# EAGLE board detector-opamp (EAGLE 6.3)
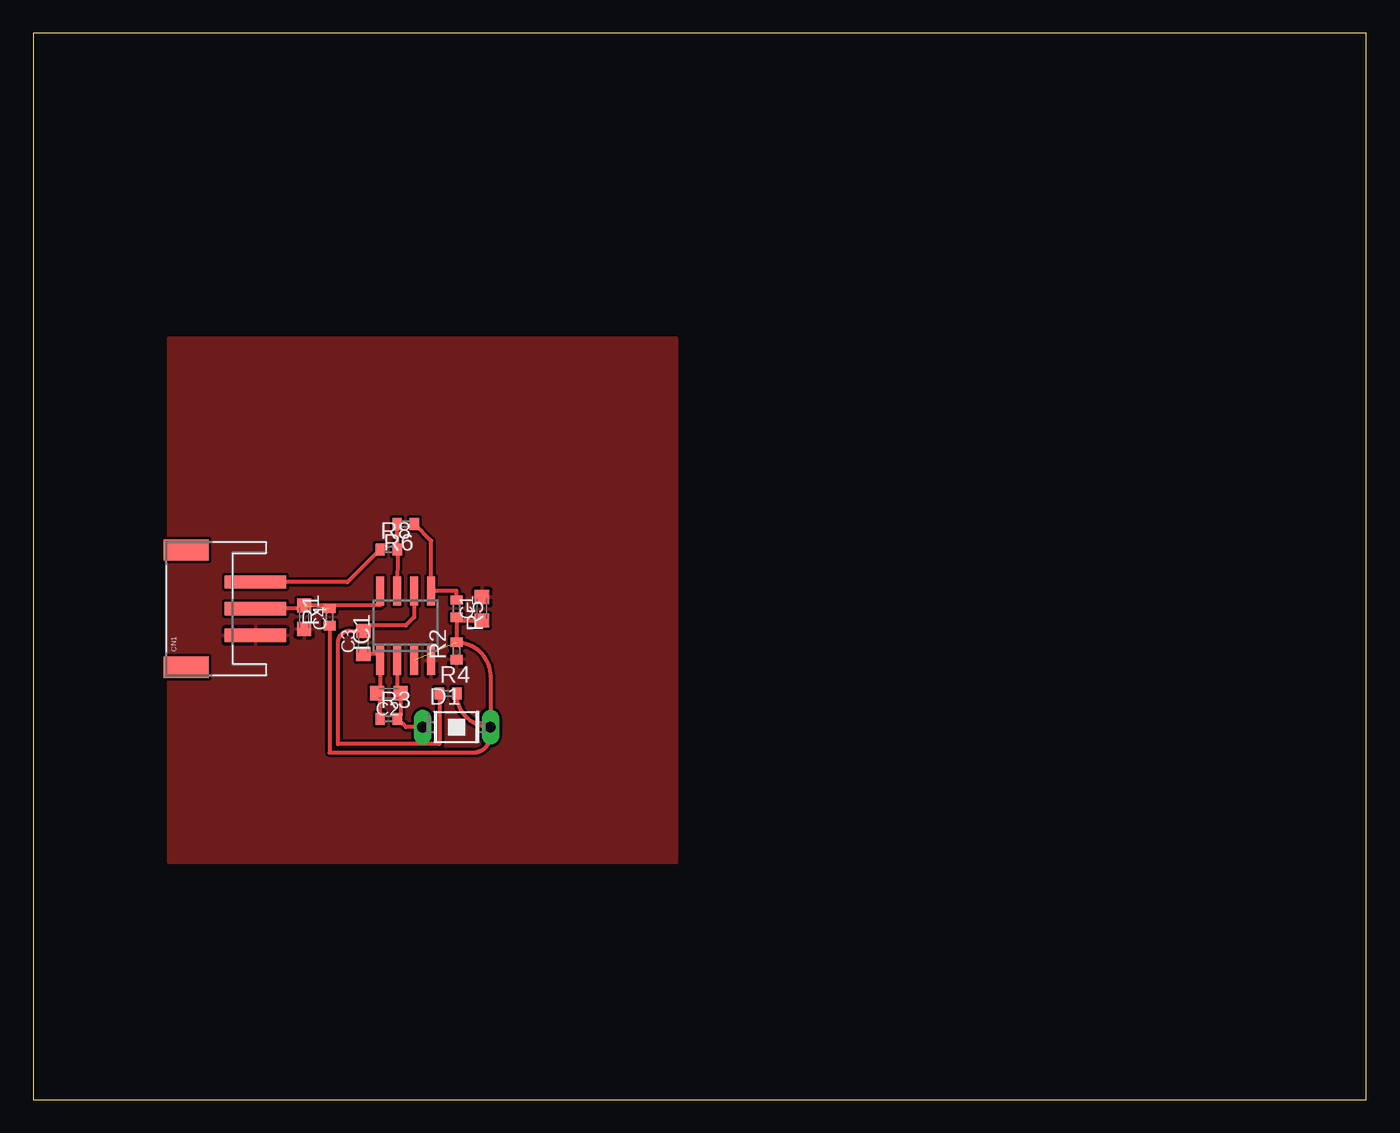
[diagram p0: board, top side]

Size 100 x 80 mm. Coordinates in mm from the lower left corner, seen from the top.
Outline: 0,0 100,0 100,80 0,80 0,0
Copper layers (1*16): Top 0.035mm / dielectric 1.5mm / Bottom 0.035mm
Design rules "default": minimum track width 10mil, minimum drill 24mil, track to track 8mil, track to pad 8mil, pad to pad 8mil, via to via 8mil, smd to smd 8mil, copper to edge 40mil, drill to drill 8mil, minimum pad ring 10mil, minimum via ring 8mil, stop-mask expansion 4mil, vias tented up to drill 0mil, thermal gap 10mil

## Footprints (pad centres in the part's own frame; a part is rotated, then mirrored left to right if it is on the bottom)
C0603K = smd 1.05 x 1.08: 1 -0.875,0; 2 0.875,0
JSTPH3 = smd 1 x 4.6: 1 -2,-2.7; 2 0,-2.7; 3 2,-2.7 | smd 1.6 x 3.4: NC1 -4.4,2.5; NC2 4.4,2.5
BPW32 = drill 0.813 long: A 0,2.54; K 0,-2.54
SO08 = smd 0.6 x 2.2: 1 -1.905,-2.6; 2 -0.635,-2.6; 3 0.635,-2.6; 4 1.905,-2.6; 5 1.905,2.6; 6 0.635,2.6; 7 -0.635,2.6; 8 -1.905,2.6
R0402 = smd 0.7 x 0.9: 1 -0.65,0; 2 0.65,0

## Placement (x,y rotation side)
C1  100n  [C0603K]  33.66,36.83 90 top
C2  2p2  [C0603K]  26.67,30.48 180 top
C3  100n  [C0603K]  24.77,34.29 90 top
C4  100n  [C0603K]  20.32,36.2 270 top
CN1  [JSTPH3]  13.97,36.83 90 top
D1  BPW34  [BPW32]  31.75,27.94 270 top
IC1  OPA2725D  [SO08]  27.94,35.56 0 top
R1  18k  [R0402]  22.23,36.2 90 top
R2  27k  [R0402]  31.75,33.66 90 top
R3  680k  [R0402]  26.67,28.57 0 top
R4  10k  [R0402]  31.11,30.48 0 top
R5  1k  [R0402]  31.75,36.83 270 top
R6  220k  [R0402]  27.94,43.18 180 top
R8  47  [R0402]  26.67,41.27 0 top

## Library data of the parts
C1-C4 CN1 R1-R6 R8 = adafruit
D1 = opto-trans-siemens; OC_FARNELL: unknown; OC_NEWARK: unknown
IC1 = linear

## Nets
+3V3: C4.1 CN1.2 IC1.8 R1.2
GND: C1.2 C4.2 CN1.1 IC1.4 R2.1
N$1: C1.1 D1.A IC1.3 R1.1 R2.2 R4.2 R5.2
N$2: C2.2 C3.1 IC1.1 R3.1
N$3: C2.1 D1.K IC1.2 R3.2
N$5: C3.2 IC1.6 R4.1
N$6: IC1.5 R5.1 R6.1
N$7: IC1.7 R6.2 R8.2
N$9: CN1.3 R8.1

## Tracks (layer width: path | path; a pad name or v marks a point on that pad's centre or on a via)
+3V3  (1 unrouted)
  Top 0.305: CN1.2 20.08,36.83 C4.1 26.04,37.07 IC1.8
GND
  pour Top: 10.16,57.15 48.26,57.15 48.26,17.78 10.16,17.78
N$1  (1 unrouted)
  Top 0.305: C1.1 31.75,35.95 R5.2 R2.2 arc-90 34.29,31.77 D1.A | R1.1 22.23,26.04 33.02,26.04 arc90 34.29,27.3 D1.A | D1.A arc-90 31.77,30.46 R4.2
N$2
  Top 0.305: R3.1 26.02,30.25 C2.2 26.04,30.72 IC1.1 26.04,33.41 C3.1
N$3
  Top 0.305: IC1.2 27.3,30.72 C2.1 27.55,28.8 R3.2 27.95,27.94 D1.K
N$5
  Top 0.305: IC1.6 28.57,36.2 27.94,35.56 25.16,35.56 C3.2 23.73,35.16 arc90 22.86,34.29 22.86,26.67 30.48,26.67 30.48,30.46 arc90 R4.1
N$6
  Top 0.305: R5.1 31.75,38.16 IC1.5 29.84,41.92 R6.1
N$7
  Top 0.305: IC1.7 R8.2 R6.2
N$9
  Top 0.305: R8.1 23.57,38.83 CN1.3